# Altium PCB ioT.PcbDoc (part 2 of 3)
Units mm, origin at the board's own origin, x right, y up, seen from the top; angles counter-clockwise.
Board outline 92 x 94 mm, 4 copper layers (Top Layer, GROUND, POWER, Bottom Layer), stack 1.369 mm thick; 127 components, 88 nets, 449 pads, 105 vias.
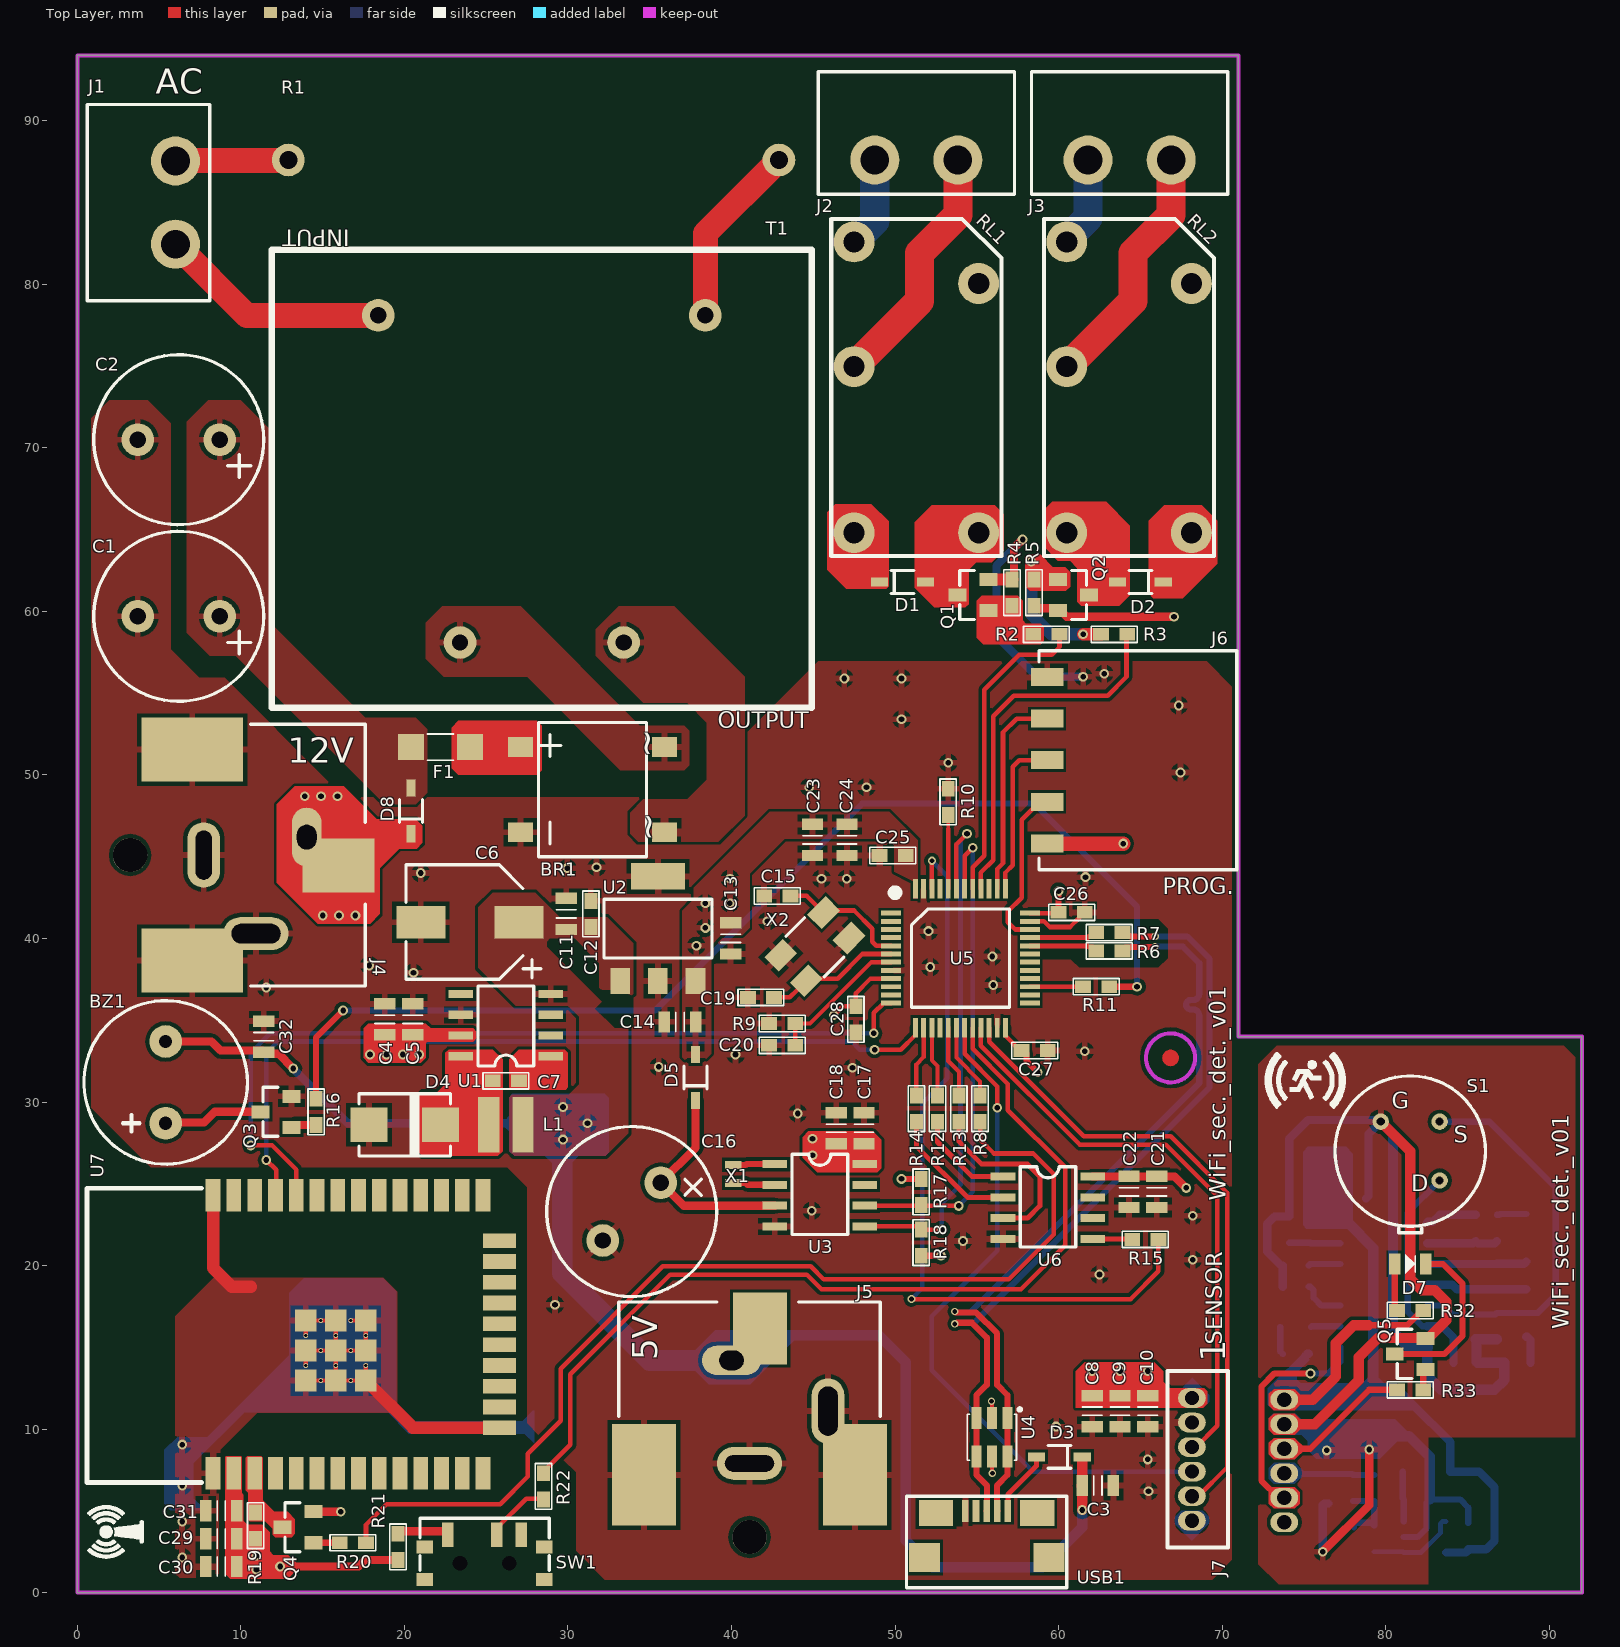
[diagram p0: Top Layer view]

## Part data (continued)
L1: library part "IND 47uH", "FIXED IND 47UH 390MA 2.3 OHM SMD", Case Code (Metric)=3030, Case Code (Imperial)=1212, Current Rating=390mA, DC Resistance (DCR)=2.3R, Manufacturer="Wurth Electronics", Max Operating Temperature=125°C, Min Operating Temperature=-40°C, Ratings=AEC-Q200, Resistor Type=Wirewound, Saturation Current=1.18A, Self Resonant Frequency=8MHz, Supplier Part Number 1=732-6947-1-ND, Test Frequency=100kHz, Tolerance=30%, Inductance=47uH, Case/Package=1212, Category="Fixed Inductors", ComponentLink1Description=https://media.digikey.com/pdf/Data%20Sheets/Wurth%20Electronics%20PDFs/Q+_Products_Flyer.pdf?src-supplier=Digi-Key, ComponentLink1URL=https://media.digikey.com/pdf/Data%20Sheets/Wurth%20Electronics%20PDFs/Q+_Products_Flyer.pdf?src-supplier=Digi-Key, Core Material=Ferrite, Designed by=BERK, Height - Seated (Max)=0.059inch, Length=0.118inch, Manufacturer Part Number=78438335470, Mount="Surface Mount", Packaging="Tape and Reel", Pricing 1="1=1,98000, 50=1,84800, 250=1,69100, 500=1,56800 (USD)", RoHS=No, RoHS Compliant=No, Shielding=Shielded, Stock 1=885, Supplier 1=Digi-Key, Width=0.118inch
Q1 Q2 Q3 Q4 Q5: "Transistor General Purpose BJT NPN 40 Volt 0.2A Automotive 3-Pin SOT-23", Case/Package=SOT-23, Collector Base Voltage (VCBO)=60V, Collector Emitter Breakdown Voltage=40V, Collector Emitter Saturation Voltage=300mV, Continuous Collector Current=200mA, Emitter Base Voltage (VEBO)=6V, Frequency=300MHz, Manufacturer="Diodes Zetex", Max Operating Temperature=150°C, Max Power Dissipation=300mW, Min Operating Temperature=-55°C, Package Quantity=3000, Power Dissipation=350mW, Supplier Part Number 1=MMBT3904-FDIDKR-ND, Category=BJTs, Collector Emitter Voltage (VCEO)=40V, Collector-emitter Voltage-Max=300mV, ComponentLink1Description=https://datasheet.ciiva.com/11201/ds30036-11201778.pdf?src-supplier=Avnet, ComponentLink1URL=https://datasheet.ciiva.com/11201/ds30036-11201778.pdf?src-supplier=Avnet, ComponentLink2Description=https://datasheet.ciiva.com/15138/getdatasheetpartid-53265-15138780.pdf?src-supplier=Verical, ComponentLink2URL=https://datasheet.ciiva.com/15138/getdatasheetpartid-53265-15138780.pdf?src-supplier=Verical, ComponentLink3Description=https://datasheet.ciiva.com/6361/ds30036-6361254.pdf?src-supplier=Digi-Key, ComponentLink3URL=https://datasheet.ciiva.com/6361/ds30036-6361254.pdf?src-supplier=Digi-Key, ComponentLink4Description=https://datasheet.ciiva.com/22711/1915516-22711750.pdf?src-supplier=Element14, ComponentLink4URL=https://datasheet.ciiva.com/22711/1915516-22711750.pdf?src-supplier=Element14, ComponentLink5Description=https://datasheet.ciiva.com/11198/ds30036-11198999.pdf?src-supplier=Avnet, ComponentLink5URL=https://datasheet.ciiva.com/11198/ds30036-11198999.pdf?src-supplier=Avnet, ComponentLink6Description=https://datasheet.ciiva.com/6361/ds30036-6361256.pdf?src-supplier=Digi-Key, ComponentLink6URL=https://datasheet.ciiva.com/6361/ds30036-6361256.pdf?src-supplier=Digi-Key, Contact Plating=Tin,Matte, Designed by=BERK, Element Configuration=Single, Gain Bandwidth Product=300MHz, Height=1mm, hFE Min=100, Lead Free="Lead Free", Length=3.05mm, Manufacturer Part Number=MMBT3904-7-F, Max Breakdown Voltage=40V, Max Collector Current=200mA, Max Frequency=300MHz, Mount="Surface Mount", Number of Elements=1, Number of Pins=3, Packaging="Tape and Reel", Polarity=NPN, Pricing 1="1=0,12000, 10=0,08600, 25=0,08280, 100=0,04660, 500=0,03664, 1000=0,02544 (USD)", Radiation Hardening=No, REACH SVHC="No SVHC", RoHS=Yes, RoHS Compliant=Yes, series=-, Stock 1=2393281, Supplier 1=Digi-Key, Transition Frequency=300MHz, Voltage Rating (DC)=40V, Weight=0.000282oz, Width=1.4mm
R1: "Resistor 5 Watt Cermet Wirewound Flameproof .27 Ohm 5% Axial Lead", Case/Package=Axial, Manufacturer="NTE Electronics", Max Operating Temperature=155°C, Min Operating Temperature=-55°C, Power Rating=5W, Resistance=270m, Supplier Part Number 1=33C8814, Temperature Coefficient=300ppm/°C, Tolerance=5%, Category="Through-Hole Resistors", ComponentLink1Description=https://datasheet.ciiva.com/15772/fivewire-15772442.pdf?src-supplier=Onlinecomponents.com, ComponentLink1URL=https://datasheet.ciiva.com/15772/fivewire-15772442.pdf?src-supplier=Onlinecomponents.com, ComponentLink2Description=http://datasheet.octopart.com/5WD27-NTE-Electronics-datasheet-137435208.pdf?src-supplier=NTE+Electronics, ComponentLink2URL=http://datasheet.octopart.com/5WD27-NTE-Electronics-datasheet-137435208.pdf?src-supplier=NTE+Electronics, ComponentLink3Description=http://datasheet.octopart.com/5WD27-NTE-Electronics-datasheet-21210163.pdf?src-supplier=Master+Electronics, ComponentLink3URL=http://datasheet.octopart.com/5WD27-NTE-Electronics-datasheet-21210163.pdf?src-supplier=Master+Electronics, Designed by=BERK, Manufacturer Part Number=5WD27, Mount="Through Hole", Pricing 1="1=0,47600 (USD)", RoHS Compliant=No, Supplier 1=Newark, Termination=Axial
R2 R3 R19 R26 R33 R35: library part "RES 1K OHM 0603", "RES 1K %1 OHM 0603 SMD", Case Code (Metric)=1608, Case Code (Imperial)=0603, Manufacturer=Yageo, Manufacturer Part Number=RC0603JR-071KL, Max Operating Temperature=155°C, Min Operating Temperature=-55°C, Package Quantity=5000, Power Rating=100mW, Resistance=1kR, Resistance Tolerance=5%, Resistor Type="Thick Film", Supplier Part Number 1=311-1.0KGRCT-ND, Temperature Coefficient=100ppm/°C, Voltage Rating=50V, Body Length=1.6mm, Case/Package=0603, Category="Chip SMD Resistors", ComponentLink1Description=https://datasheet.ciiva.com/8883/pyu-rc0603-51-rohs-l-4-8883051.pdf?src-supplier=Avnet, ComponentLink1URL=https://datasheet.ciiva.com/8883/pyu-rc0603-51-rohs-l-4-8883051.pdf?src-supplier=Avnet, ComponentLink2Description=https://datasheet.ciiva.com/7746/443971-7746461.pdf?src-supplier=Element14, ComponentLink2URL=https://datasheet.ciiva.com/7746/443971-7746461.pdf?src-supplier=Element14, ComponentLink3Description=https://datasheet.ciiva.com/22747/443971-22747533.pdf?src-supplier=Element14, ComponentLink3URL=https://datasheet.ciiva.com/22747/443971-22747533.pdf?src-supplier=Element14, ComponentLink4Description=https://datasheet.ciiva.com/7746/443971-7746462.pdf?src-supplier=Element14, ComponentLink4URL=https://datasheet.ciiva.com/7746/443971-7746462.pdf?src-supplier=Element14, Construction=Rectangular, Contact Plating=Tin,Matte, Depth=0.8mm, Designed by=BERK, Height=0.45mm, Lead Free="Lead Free", Length=1.6mm, Military Standard=Not, Number of Pins=2, Packaging="Tape and Reel", Pricing 1="1=0,10000, 10=0,01900, 100=0,00770, 1000=0,00344, 2500=0,00298 (USD)", Radiation Hardening=No, REACH SVHC=Unknown, RoHS=Yes, RoHS Compliant=Yes, series=RC, Size Code=0603, Stock 1=5112056, Supplier 1=Digi-Key, Termination=SMD/SMT, Tolerance=5%, Voltage Rating (DC)=50V, Width=0.8mm
R4 R5 R25 R28 R37: library part "RES 10K OHM 0603", "RES 10K %1 OHM 0603 SMD", Case Code (Metric)=1608, Case Code (Imperial)=0603, Manufacturer=Yageo, Max Operating Temperature=155°C, Max Power Dissipation=100mW, Min Operating Temperature=-55°C, Resistance=10kR, Resistance Tolerance=1%, Resistor Type="Thick Film", Supplier Part Number 1=311-10.0KHRCT-ND, Temperature Coefficient=100ppm/°C, Voltage Rating=75V, Voltage Rating (DC)=50V, Case/Package=0603, Category="Chip SMD Resistors", ComponentLink1Description=https://datasheet.ciiva.com/7660/38590-7660789.pdf?src-supplier=Element14, ComponentLink1URL=https://datasheet.ciiva.com/7660/38590-7660789.pdf?src-supplier=Element14, ComponentLink2Description=https://datasheet.ciiva.com/15189/getdatasheetpartid-409289-15189591.pdf?src-supplier=Verical, ComponentLink2URL=https://datasheet.ciiva.com/15189/getdatasheetpartid-409289-15189591.pdf?src-supplier=Verical, ComponentLink3Description=https://datasheet.ciiva.com/46440/1868787-46440891.pdf?src-supplier=Element14, ComponentLink3URL=https://datasheet.ciiva.com/46440/1868787-46440891.pdf?src-supplier=Element14, ComponentLink4Description=https://datasheet.ciiva.com/7983/443971-7983596.pdf?src-supplier=Element14, ComponentLink4URL=https://datasheet.ciiva.com/7983/443971-7983596.pdf?src-supplier=Element14, ComponentLink5Description=https://datasheet.ciiva.com/7746/1738695-7746239.pdf?src-supplier=Element14, ComponentLink5URL=https://datasheet.ciiva.com/7746/1738695-7746239.pdf?src-supplier=Element14, ComponentLink6Description=https://datasheet.ciiva.com/22747/443971-22747519.pdf?src-supplier=Element14, ComponentLink6URL=https://datasheet.ciiva.com/22747/443971-22747519.pdf?src-supplier=Element14, Construction=Rectangular, Depth=0.8mm, Designed by=BERK, Features="Moisture Resistant", Height=0.45mm, Lead Free="Lead Free", Lead Pitch=0.3mm, Length=1.6mm, Manufacturer Part Number=RC0603FR-0710KL, Military Standard=Not, Number of Pins=2, Number of Terminations=2, Packaging="Tape and Reel", Power Rating=100mW, Pricing 1="1=0,10000, 10=0,02300, 100=0,00930, 1000=0,00417, 2500=0,00362 (USD)", REACH SVHC=Unknown, RoHS=Yes, RoHS Compliant=Yes, series=RC, Size Code=0603, Stock 1=24140601, Supplier 1=Digi-Key, Termination=SMD/SMT, Tolerance=1%, Weight=7.1E-05oz, Width=0.8mm
R6 R7: library part "RES 15 OHM 0603", "RES 15 %5 OHM 0603 SMD", Case Code (Metric)=1608, Case Code (Imperial)=0603, Manufacturer=Yageo, Max Operating Temperature=155°C, Max Power Dissipation=100mW, Min Operating Temperature=-55°C, Package Quantity=1, Resistance=15R, Resistance Tolerance=5%, Resistor Type="Thick Film", Supplier Part Number 1=311-15GRCT-ND, Temperature Coefficient=100ppm/°C, Voltage Rating=75V, Voltage Rating (DC)=50V, Case/Package=0603, Category="Chip SMD Resistors", ComponentLink1Description=https://datasheet.ciiva.com/2453/pyu-r-int-thick-7-2453085.pdf?src-supplier=Digi-Key, ComponentLink1URL=https://datasheet.ciiva.com/2453/pyu-r-int-thick-7-2453085.pdf?src-supplier=Digi-Key, ComponentLink2Description=https://datasheet.ciiva.com/7746/443971-7746445.pdf?src-supplier=Element14, ComponentLink2URL=https://datasheet.ciiva.com/7746/443971-7746445.pdf?src-supplier=Element14, ComponentLink3Description=https://datasheet.ciiva.com/2453/pyu-r-int-thick-7-2453086.pdf?src-supplier=Digi-Key, ComponentLink3URL=https://datasheet.ciiva.com/2453/pyu-r-int-thick-7-2453086.pdf?src-supplier=Digi-Key, ComponentLink4Description=https://datasheet.ciiva.com/7746/443971-7746446.pdf?src-supplier=Element14, ComponentLink4URL=https://datasheet.ciiva.com/7746/443971-7746446.pdf?src-supplier=Element14, ComponentLink5Description=https://datasheet.ciiva.com/2453/pyu-r-int-thick-7-2453087.pdf?src-supplier=Digi-Key, ComponentLink5URL=https://datasheet.ciiva.com/2453/pyu-r-int-thick-7-2453087.pdf?src-supplier=Digi-Key, Construction=Rectangular, Depth=0.8mm, Designed by=BERK, Features="Moisture Resistant", Height=0.022inch, Lead Free="Lead Free", Length=1.6mm, Manufacturer Part Number=RC0603JR-0715RL, Military Standard=Not, Number of Pins=2, Number of Terminations=2, Packaging="Tape and Reel", Power Rating=100mW, Pricing 1="1=0,10000, 10=0,01900, 100=0,00770, 1000=0,00344, 2500=0,00298 (USD)", REACH SVHC="No SVHC", RoHS=Yes, RoHS Compliant=Yes, series=RC, Stock 1=1720, Supplier 1=Digi-Key, Termination=SMD/SMT, Tolerance=5%, Weight=7.1E-05oz, Width=0.8mm, Working Voltage=75V
R8 R9 R10 R11 R12 R13 R14 R15 R16 R20 R21 R22 R32: library part "RES 100 OHM 0603", "RES 100 %5 OHM 0603 SMD", Case Code (Metric)=1608, Case Code (Imperial)=0603, Manufacturer=Yageo, Max Operating Temperature=155°C, Max Power Dissipation=100mW, Min Operating Temperature=-55°C, Resistance=100R, Resistance Tolerance=5%, Resistor Type="Thick Film", Supplier Part Number 1=311-100GRCT-ND, Temperature Coefficient=100ppm/°C, Voltage Rating=50V, Case/Package=0603, Category="Chip SMD Resistors", ComponentLink1Description=https://datasheet.ciiva.com/15189/getdatasheetpartid-325207-15189846.pdf?src-supplier=Verical, ComponentLink1URL=https://datasheet.ciiva.com/15189/getdatasheetpartid-325207-15189846.pdf?src-supplier=Verical, ComponentLink2Description=https://datasheet.ciiva.com/8883/pyu-rc0603-51-rohs-l-4-8883047.pdf?src-supplier=Avnet, ComponentLink2URL=https://datasheet.ciiva.com/8883/pyu-rc0603-51-rohs-l-4-8883047.pdf?src-supplier=Avnet, ComponentLink3Description=https://datasheet.ciiva.com/7746/443971-7746425.pdf?src-supplier=Element14, ComponentLink3URL=https://datasheet.ciiva.com/7746/443971-7746425.pdf?src-supplier=Element14, ComponentLink4Description=https://datasheet.ciiva.com/7746/443971-7746426.pdf?src-supplier=Element14, ComponentLink4URL=https://datasheet.ciiva.com/7746/443971-7746426.pdf?src-supplier=Element14, Construction=Rectangular, Contact Plating=Tin,Matte, Depth=0.8mm, Designed by=BERK, Features="Moisture Resistant", Lead Free="Lead Free", Length=1.6mm, Manufacturer Part Number=RC0603JR-07100RL, Military Standard=Not, Number of Pins=2, Number of Terminations=2, Packaging="Tape and Reel", Power Rating=100mW, Pricing 1="1=0,10000, 10=0,01900, 100=0,00770, 1000=0,00344, 2500=0,00298 (USD)", Radiation Hardening=No, REACH SVHC=Unknown, RoHS=Yes, RoHS Compliant=Yes, series=RC, Size Code=0603, Stock 1=4334796, Supplier 1=Digi-Key, Termination=SMD/SMT, Tolerance=5%, Voltage Rating (DC)=50V, Width=0.8mm
R17 R18: library part "RES 4K7 OHM 0603", "RES 4K7 %5 OHM 0603 SMD", Case Code (Metric)=1608, Case Code (Imperial)=0603, Manufacturer=Yageo, Max Operating Temperature=155°C, Max Power Dissipation=100mW, Min Operating Temperature=-55°C, Resistance=4.7kR, Resistance Tolerance=5%, Resistor Type="Thick Film", Supplier Part Number 1=311-4.7KGRCT-ND, Temperature Coefficient=100ppm/°C, Voltage Rating=50V, Case/Package=0603, Category="Chip SMD Resistors", ComponentLink1Description=https://datasheet.ciiva.com/46412/443971-46412858.pdf?src-supplier=Element14, ComponentLink1URL=https://datasheet.ciiva.com/46412/443971-46412858.pdf?src-supplier=Element14, Construction=Rectangular, Depth=0.8mm, Designed by=BERK, Features="Moisture Resistant", Lead Free="Lead Free", Length=1.6mm, Manufacturer Part Number=RC0603JR-074K7L, Military Standard=Not, Number of Pins=2, Number of Terminations=2, Packaging="Tape and Reel", Power Rating=100mW, Pricing 1="1=0,10000, 10=0,01900, 100=0,00770, 1000=0,00344, 2500=0,00298 (USD)", REACH SVHC="No SVHC", RoHS=Yes, RoHS Compliant=Yes, series=RC, Size Code=0603, Stock 1=3901839, Supplier 1=Digi-Key, Termination=SMD/SMT, Tolerance=5%, Voltage Rating (DC)=50V, Width=0.8mm
R23 R27: library part "RES 560K OHM 0603", "RES SMD 560K OHM 5% 1/10W 0603", Case Code (Metric)=1608, Case Code (Imperial)=0603, Manufacturer=Yageo, Max Operating Temperature=155°C, Max Power Dissipation=100mW, Min Operating Temperature=-55°C, Package Quantity=1, Resistance=560kR, Resistance Tolerance=5%, Resistor Type="Thick Film", Supplier Part Number 1=311-560KGRCT-ND, Temperature Coefficient=100ppm/°C, Voltage Rating=75V, Voltage Rating (DC)=50V, Case/Package=0603, Category="Chip SMD Resistors", ComponentLink1Description=https://datasheet.ciiva.com/2453/pyu-r-int-thick-7-2453056.pdf?src-supplier=Digi-Key, ComponentLink1URL=https://datasheet.ciiva.com/2453/pyu-r-int-thick-7-2453056.pdf?src-supplier=Digi-Key, ComponentLink2Description=https://datasheet.ciiva.com/2453/pyu-r-int-thick-7-2453057.pdf?src-supplier=Digi-Key, ComponentLink2URL=https://datasheet.ciiva.com/2453/pyu-r-int-thick-7-2453057.pdf?src-supplier=Digi-Key, ComponentLink3Description=https://datasheet.ciiva.com/2453/pyu-r-int-thick-7-2453055.pdf?src-supplier=Digi-Key, ComponentLink3URL=https://datasheet.ciiva.com/2453/pyu-r-int-thick-7-2453055.pdf?src-supplier=Digi-Key, Construction=Rectangular, Depth=0.8mm, Designed by=BERK, Features="Moisture Resistant", Height=0.022inch, Lead Free="Lead Free", Length=1.6mm, Manufacturer Part Number=RC0603JR-07560KL, Military Standard=Not, Number of Pins=2, Number of Terminations=2, Packaging="Tape and Reel", Power Rating=100mW, Pricing 1="1=0,10000, 10=0,01900, 100=0,00770, 1000=0,00344, 2500=0,00298 (USD)", REACH SVHC=Unknown, RoHS=Yes, RoHS Compliant=Yes, series=RC, Stock 1=686040, Supplier 1=Digi-Key, Technology="THICK FILM", Termination=SMD/SMT, Tolerance=5%, Weight=7.1E-05oz, Width=0.8mm, Working Voltage=75V
R24 R34 R36: library part "RES 220K OHM 0603", "RES 220K %5 OHM 0603 SMD", Case Code (Metric)=1608, Case Code (Imperial)=0603, Manufacturer=Yageo, Max Operating Temperature=155°C, Max Power Dissipation=100mW, Min Operating Temperature=-55°C, Package Quantity=1, Resistance=220kR, Resistance Tolerance=5%, Resistor Type="Thick Film", Supplier Part Number 1=311-220KGRCT-ND, Temperature Coefficient=100ppm/°C, Voltage Rating=50V, Case/Package=0603, Category="Chip SMD Resistors", ComponentLink1Description=https://datasheet.ciiva.com/2452/pyu-r-int-thick-7-2452923.pdf?src-supplier=Digi-Key, ComponentLink1URL=https://datasheet.ciiva.com/2452/pyu-r-int-thick-7-2452923.pdf?src-supplier=Digi-Key, ComponentLink2Description=https://datasheet.ciiva.com/2452/pyu-r-int-thick-7-2452924.pdf?src-supplier=Digi-Key, ComponentLink2URL=https://datasheet.ciiva.com/2452/pyu-r-int-thick-7-2452924.pdf?src-supplier=Digi-Key, ComponentLink3Description=https://datasheet.ciiva.com/2452/pyu-r-int-thick-7-2452925.pdf?src-supplier=Digi-Key, ComponentLink3URL=https://datasheet.ciiva.com/2452/pyu-r-int-thick-7-2452925.pdf?src-supplier=Digi-Key, Construction=Rectangular, Deisgned by=BERK, Depth=0.8mm, Features="Moisture Resistant", Height=0.022inch, Lead Free="Lead Free", Length=1.6mm, Manufacturer Part Number=RC0603JR-07220KL, Military Standard=Not, Number of Pins=2, Number of Terminations=2, Packaging="Tape and Reel", Power Rating=100mW, Pricing 1="1=0,10000, 10=0,01900, 100=0,00770, 1000=0,00344, 2500=0,00298 (USD)", REACH SVHC="No SVHC", RoHS=Yes, RoHS Compliant=Yes, series=RC, Size Code=0603, Stock 1=558053, Supplier 1=Digi-Key, Termination=SMD/SMT, Tolerance=5%, Voltage Rating (DC)=50V, Width=0.031inch
R29 R30: library part "RES 0 OHM 0603", "RES 0 %1 OHM 0603 SMD", Case Code (Metric)=1608, Case Code (Imperial)=0603, Manufacturer=Yageo, Max Operating Temperature=155°C, Max Power Dissipation=100mW, Min Operating Temperature=-55°C, Package Quantity=5000, Resistance=0R, Resistance Tolerance=5%, Resistor Type="Thick Film", Supplier Part Number 1=311-0.0GRCT-ND, Temperature Coefficient=200ppm/°C, Tolerance=1%, Voltage Rating=50V, Case/Package=0603, Category="Chip SMD Resistors", ComponentLink1Description=https://datasheet.ciiva.com/11808/pyu-r-int-6-11808700.pdf?src-supplier=RSComponents, ComponentLink1URL=https://datasheet.ciiva.com/11808/pyu-r-int-6-11808700.pdf?src-supplier=RSComponents, ComponentLink2Description=https://datasheet.ciiva.com/7746/1738695-7746421.pdf?src-supplier=Element14, ComponentLink2URL=https://datasheet.ciiva.com/7746/1738695-7746421.pdf?src-supplier=Element14, ComponentLink3Description=https://datasheet.ciiva.com/8883/pyu-rc0603-51-rohs-l-4-8883045.pdf?src-supplier=Avnet, ComponentLink3URL=https://datasheet.ciiva.com/8883/pyu-rc0603-51-rohs-l-4-8883045.pdf?src-supplier=Avnet, ComponentLink4Description=https://datasheet.ciiva.com/15189/getdatasheetpartid-329462-15189845.pdf?src-supplier=Verical, ComponentLink4URL=https://datasheet.ciiva.com/15189/getdatasheetpartid-329462-15189845.pdf?src-supplier=Verical, ComponentLink5Description=https://datasheet.ciiva.com/7746/1738695-7746422.pdf?src-supplier=Element14, ComponentLink5URL=https://datasheet.ciiva.com/7746/1738695-7746422.pdf?src-supplier=Element14, ComponentLink6Description=https://datasheet.ciiva.com/12555/rc0603-272842-12555254.pdf?src-supplier=Mouser, ComponentLink6URL=https://datasheet.ciiva.com/12555/rc0603-272842-12555254.pdf?src-supplier=Mouser, ComponentLink7Description=https://datasheet.ciiva.com/22747/443971-22747530.pdf?src-supplier=Element14, ComponentLink7URL=https://datasheet.ciiva.com/22747/443971-22747530.pdf?src-supplier=Element14, Construction=Rectangular, Contact Plating=Tin,Matte, Depth=0.8mm, Designed by=BERK, Features="Moisture Resistant", Height=0.45mm, Lead Free="Lead Free", Length=1.6mm, Manufacturer Part Number=RC0603JR-070RL, Military Standard=Not, Number of Pins=2, Number of Terminations=2, Packaging="Tape and Reel", Power Rating=100mW, Pricing 1="1=0,10000, 10=0,01700, 25=0,01240, 50=0,00940, 100=0,00700, 250=0,00532, 500=0,00424, 1000=0,00313 (USD)", Radiation Hardening=No, REACH SVHC="No SVHC", RoHS=Yes, RoHS Compliant=Yes, series=RC, Size Code=0603, Stock 1=4657486, Supplier 1=Digi-Key, Technology="THICK FILM", Termination=SMD/SMT, Voltage Rating (DC)=50V, Width=0.8mm
R31: library part "RES 43K OHM 0603", "RES 43K %5 OHM 0603 SMD", Case Code (Metric)=1608, Case Code (Imperial)=0603, Manufacturer=Yageo, Max Operating Temperature=155°C, Max Power Dissipation=100mW, Min Operating Temperature=-55°C, Package Quantity=1, Resistance=43kR, Resistor Type="Thick Film", Supplier Part Number 1=311-43KGRCT-ND, Temperature Coefficient=100ppm/°C, Tolerance=5%, Voltage Rating=75V, Voltage Rating (DC)=50V, Case/Package=0603, Category="Chip SMD Resistors", ComponentLink1Description=https://datasheet.ciiva.com/2453/pyu-r-int-thick-7-2453052.pdf?src-supplier=Digi-Key, ComponentLink1URL=https://datasheet.ciiva.com/2453/pyu-r-int-thick-7-2453052.pdf?src-supplier=Digi-Key, ComponentLink2Description=https://datasheet.ciiva.com/2453/pyu-r-int-thick-7-2453053.pdf?src-supplier=Digi-Key, ComponentLink2URL=https://datasheet.ciiva.com/2453/pyu-r-int-thick-7-2453053.pdf?src-supplier=Digi-Key, ComponentLink3Description=https://datasheet.ciiva.com/2453/pyu-r-int-thick-7-2453054.pdf?src-supplier=Digi-Key, ComponentLink3URL=https://datasheet.ciiva.com/2453/pyu-r-int-thick-7-2453054.pdf?src-supplier=Digi-Key, Construction=Rectangular, Depth=0.8mm, Designed by=BERK, Features="Moisture Resistant", Height=0.022inch, Lead Free="Lead Free", Length=1.6mm, Manufacturer Part Number=RC0603JR-0743KL, Military Standard=Not, Number of Terminations=2, Packaging="Tape and Reel", Power Rating=100mW, Pricing 1="1=0,10000, 10=0,01900, 100=0,00770, 1000=0,00344, 2500=0,00298 (USD)", RoHS=Yes, RoHS Compliant=Yes, series=RC, Stock 1=127716, Supplier 1=Digi-Key, Technology="THICK FILM", Termination=SMD/SMT, Weight=7.1E-05oz, Width=0.8mm, Working Voltage=75V
RL1 RL2: "General Purpose Relay SPDT (1 Form C) 12VDC Coil Through Hole", Coil Current=33.3mA, Coil Power=400mW, Coil Resistance=360R, Coil Voltage (DC)=12V, Contact Current Rating=10A, Manufacturer=Panasonic, Max Operating Temperature=85°C, Max Voltage Rating (AC)=250V, Min Operating Temperature=-40°C, Package Quantity=100, Supplier Part Number 1=255-3562-ND, Case/Package=ALQ112, Category="Power Relays", Coil Type=Non-Latching, ComponentLink1Description=https://datasheet.ciiva.com/24388/307ds-61b20-en-lq-24388909.pdf?src-supplier=Onlinecomponents.com, ComponentLink1URL=https://datasheet.ciiva.com/24388/307ds-61b20-en-lq-24388909.pdf?src-supplier=Onlinecomponents.com, Contact Material=Silver, Depth=10mm, Designed by=BERK, Height=16mm, Lead Free="Lead Free", Length=20mm, Manufacturer Part Number=ALQ112, Number of Pins=5, Operate Time=20ms, Packaging=Carton, Power Consumption=400mW, Power Rating=400mW, Pricing 1="1=1,22000, 10=1,14800, 25=1,02000, 50=0,96900, 100=0,91800, 250=0,81600, 500=0,76500, 1000=0,71400, 5000=0,68850 (USD)", REACH SVHC=Unknown, Relay Type="General Purpose", Release Time=20ms, RoHS=Yes, RoHS Compliant=Yes, series=ALQ, Stock 1=10772, Supplier 1=Digi-Key, Termination="PC Pin", Throw Configuration=SPDT, Voltage Rating (AC)=250V, Weight=7g, Width=10mm
RT1: "Thermistor PTC 10K Ohm 1% 1206", Case/Package=1206, Manufacturer="Vishay Dale", Max Operating Temperature=125°C, Max Power Dissipation=125mW, Min Operating Temperature=-55°C, Package Quantity=5000, Resistance=10kR, Resistance Tolerance=1%, Supplier Part Number 1=541-3533-1-ND, Voltage=40V, Category=Thermistors, ComponentLink1Description=https://datasheet.ciiva.com/2852/tfpt-2852076.pdf?src-supplier=Digi-Key, ComponentLink1URL=https://datasheet.ciiva.com/2852/tfpt-2852076.pdf?src-supplier=Digi-Key, Depth=1.6mm, Designed by=BERK, Height=0.55mm, Lead Free="Lead Free", Length=3.2mm, Manufacturer Part Number=TFPT1206L1002FM, Mount="Surface Mount", Number of Pins=2, Packaging="Tape and Reel", Power Rating=125mW, Pricing 1="1=0,99000, 10=0,92300, 25=0,85400, 50=0,73980, 100=0,67110, 500=0,56432, 1000=0,50332 (USD)", RoHS=Yes, RoHS Compliant=Yes, series=TFPT, Stock 1=9062, Supplier 1=Digi-Key, Termination=SMD/SMT, Tolerance=1%, Width=1.6mm
S1: "SENSOR PYRO DETECTOR DUAL MOTION", Case/Package=LHI, Max Supply Voltage=12, Min Supply Voltage=2, Supplier Part Number=1601-LHI878/3902-ND, Designed by=BERK, Supplier 1=Digi-Key, Type="Pyro Detector"
SW1: "Slide Switch, SPDT, 0.025A, 24V, SMD", Case/Package=Axial, Current Rating=25mA, Manufacturer=E-Switch, Max Operating Temperature=175°C, Max Power Dissipation=5W, Min Operating Temperature=-20°C, Operating Force=150gf, Supplier Part Number 1=EG5720CT-ND, Tolerance=4.95%, Voltage Rating (DC)=24V, Zener Voltage=9.1V, Actuator Length=1.4mm, Actuator Type=Standard, ComponentLink1Description=https://media.digikey.com/pdf/Data%20Sheets/E-Switch%20PDFs/EG1215_Series_Ds.pdf?src-supplier=Digi-Key, ComponentLink1URL=https://media.digikey.com/pdf/Data%20Sheets/E-Switch%20PDFs/EG1215_Series_Ds.pdf?src-supplier=Digi-Key, ComponentLink2Description=http://www.farnell.com/datasheets/2645007.pdf?src-supplier=Farnell, ComponentLink2URL=http://www.farnell.com/datasheets/2645007.pdf?src-supplier=Farnell, Designed by=BERK, Electrical Life=10000Cycles, Manufacturer Part Number=EG1215AA, Mechanical Life=10000Cycles, Mount="Surface Mount,Through Hole", Packaging="Cut Tape", Pricing 1="1=0,85000, 10=0,81900, 25=0,76560, 100=0,66470, 250=0,60480, 500=0,56070, 1000=0,51975 (USD)", RoHS=No, Stock 1=6245, Supplier 1=Digi-Key, Switch Function=On-On, Switch Travel=1.5mm, Termination="Gull Wing", Throw Configuration=SPDT, Impedance=2R
T1: "230-12 Transformer 1VA", Manufacturer="Zettler Magnetics", Operating Frequency=50-60Hz, Primary Voltage=230V, Rated Power=1VA, Secondary Voltage=12V, Supplier Part Number 1=2469-BV302S12010-ZU-ND, Designed by=BERK, Manufacturer Part Number=BV302S12010-ZU, RoHS=No, Supplier 1=Digi-Key
U1: "Switching Voltage Regulators Pwr Cnvtr Hi Eff 1A SD Vtg Reg", Case/Package="SOIC N", Manufacturer="TI National Semiconductor", Max Operating Temperature=125°C, Max Output Current=1A, Max Input Voltage=40V, Min Operating Temperature=-40°C, Min Input Voltage=8V, Output Voltage=12V, Package Quantity=2500, Quiescent Current=2.5mA, Supplier Part Number 1=296-35410-1-ND, Switching Frequency=260kHz, Category="Voltage Regulators - Switching", ComponentLink1Description=https://datasheet.ciiva.com/41457/001013881-da-01-en-ic-reg-buck-lm2675mx-12-nopb-soic-8-tid-41457896.pdf?src-supplier=Conrad, ComponentLink1URL=https://datasheet.ciiva.com/41457/001013881-da-01-en-ic-reg-buck-lm2675mx-12-nopb-soic-8-tid-41457896.pdf?src-supplier=Conrad, ComponentLink2Description=https://datasheet.ciiva.com/3220/lm2675-3220840.pdf?src-supplier=Avnet, ComponentLink2URL=https://datasheet.ciiva.com/3220/lm2675-3220840.pdf?src-supplier=Avnet, Contact Plating=Tin, Designed by=BERK, Efficiency=94%, Lead Free="Lead Free", Manufacturer Part Number=LM2675MX-12/NOPB, Mount="Surface Mount", Number of Outputs=1, Number of Pins=8, Operating Supply Voltage=40V, Output Current=1A, Output Type=Fixed, Packaging="Tape and Reel", Pricing 1="1=4,49000, 10=4,03600, 25=3,81600, 100=3,13760, 250=2,81536, 500=2,71360, 1000=2,25568 (USD)", Radiation Hardening=No, RoHS=Yes, RoHS Compliant=Yes, series=LM2675, Stock 1=1475, Supplier 1=Digi-Key, Synchronous Rectifier=No
U2: "LDO Regulator Pos 3.3V 1A 4-Pin(3+Tab) SOT-223 T/R", Case/Package=SOT-223, Dropout Voltage=500mV, Manufacturer=Diodes, Max Operating Temperature=85°C, Max Output Current=1A, Max Power Dissipation=1.1W, Max Input Voltage=6V, Min Current Limit=1.1A, Min Operating Temperature=-40°C, Min Input Voltage=2.2V, Output Voltage=3.3V, Package Quantity=1, Power Dissipation=1.1kW, Power Supply Rejection Ratio (PSRR)=65dB, Quiescent Current=70uA, Reference Voltage=800mV, Supplier Part Number 1=AP7361-33E-13DICT-ND, Accuracy=1%, Category="Voltage Regulators - Linear", ComponentLink1Description=https://datasheet.ciiva.com/26926/getdatasheetpartid-670786-26926141.pdf?src-supplier=Verical, ComponentLink1URL=https://datasheet.ciiva.com/26926/getdatasheetpartid-670786-26926141.pdf?src-supplier=Verical, ComponentLink2Description=https://datasheet.ciiva.com/25651/ap7361-25651049.pdf?src-supplier=Digi-Key, ComponentLink2URL=https://datasheet.ciiva.com/25651/ap7361-25651049.pdf?src-supplier=Digi-Key, ComponentLink3Description=https://datasheet.ciiva.com/29568/ap7361-29568378.pdf?src-supplier=Digi-Key, ComponentLink3URL=https://datasheet.ciiva.com/29568/ap7361-29568378.pdf?src-supplier=Digi-Key, ComponentLink4Description=https://datasheet.ciiva.com/29568/ap7361-29568379.pdf?src-supplier=Digi-Key, ComponentLink4URL=https://datasheet.ciiva.com/29568/ap7361-29568379.pdf?src-supplier=Digi-Key, Contact Plating=Tin,Matte, Designed by=BERK, Lead Free="Lead Free", Manufacturer Part Number=AP7361-33E-13, Mount="Surface Mount", Number of Outputs=1, Number of Pins=4, Number of Regulators=1, Output Current=1A, Output Type=Fixed, Packaging="Tape and Reel", Polarity=Positive, Pricing 1="1=0,51000, 10=0,41400, 25=0,37840, 100=0,25510, 250=0,21116, 500=0,19356, 1000=0,14517 (USD)", Radiation Hardening=No, REACH SVHC="No SVHC", RoHS=Yes, RoHS Compliant=Yes, series=-, Stock 1=45122, Supplier 1=Digi-Key, Weight=0.000282oz
U3: "IC RTC CLK/CALENDAR I2C 8-SOIC", Case/Package=SOIC, Manufacturer=STMicroelectronics, Max Operating Temperature=85°C, Max Supply Voltage=5.5V, Min Operating Temperature=-40°C, Min Supply Voltage=2V, Package Quantity=2500, Supplier Part Number 1=497-4697-1-ND, Temperature Grade=INDUSTRIAL, Category=Memory, ComponentLink1Description=https://datasheet.ciiva.com/25889/cd00001542-25889923.pdf?src-supplier=Avnet+Europe, ComponentLink1URL=https://datasheet.ciiva.com/25889/cd00001542-25889923.pdf?src-supplier=Avnet+Europe, ComponentLink2Description=https://datasheet.ciiva.com/16213/cd00001542-16213654.pdf?src-supplier=Future+Electronics, ComponentLink2URL=https://datasheet.ciiva.com/16213/cd00001542-16213654.pdf?src-supplier=Future+Electronics, ComponentLink3Description=https://datasheet.ciiva.com/7630/1837112-7630077.pdf?src-supplier=Element14, ComponentLink3URL=https://datasheet.ciiva.com/7630/1837112-7630077.pdf?src-supplier=Element14, ComponentLink4Description=https://datasheet.ciiva.com/41459/001185345-da-01-en-ic-rtc-srl-512kbit-m41t00m6f-soic-8-stm-41459818.pdf?src-supplier=Conrad, ComponentLink4URL=https://datasheet.ciiva.com/41459/001185345-da-01-en-ic-rtc-srl-512kbit-m41t00m6f-soic-8-stm-41459818.pdf?src-supplier=Conrad, Date Format=YY-MM-DD-dd, Designed by=BERK, Height=1.5mm, Lead Free="Lead Free", Length=5mm, Logic Function=Clock, Manufacturer Part Number=M41T00M6F, Memory Size=8B, Mount="Surface Mount", Non-volatile Memory Size=8B, Number of Pins=8, Packaging="Tape and Reel", Pricing 1="1=2,81000, 10=2,52200, 25=2,37960, 100=2,02750, 250=1,90376, 500=1,79600 (USD)", Radiation Hardening=No, RAM Size=8B, REACH SVHC="No SVHC", RoHS=Yes, RoHS Compliant=Yes, series=M41T00, Stock 1=13199, Supplier 1=Digi-Key, Supply Voltage-Nom=5.5V, Time Format=HH:MM:SS, Weight=0.019048oz, Width=4mm, Interface=I2C,Serial,2-Wire
U4: library part "USB PROTECTION", "TVS DIODE 5.25V 17V SOT23-6", Breakdown Voltage=6V, Capacitance=3.5pF, Case/Package=SOT-23, Clamping Voltage=17V, Leakage Current=150nA, Manufacturer=STMicroelectronics, Max Operating Temperature=125°C, Min Operating Temperature=-40°C, Operating Supply Voltage=1.1V, Package Quantity=3000, Peak Pulse Current=5A, Power Line Protection=Yes, Reverse Standoff Voltage=5.25V, Supplier Part Number 1=497-5235-1-ND, Test Current=1mA, Working Voltage=5V, Category="TVS Diodes", Clamping Voltage-Max=17V, ComponentLink1Description=https://datasheet.ciiva.com/1268/1690354-1268384.pdf?src-supplier=Element14, ComponentLink1URL=https://datasheet.ciiva.com/1268/1690354-1268384.pdf?src-supplier=Element14, ComponentLink2Description=https://datasheet.ciiva.com/4508/cd00050750-113117-4508433.pdf?src-supplier=Mouser, ComponentLink2URL=https://datasheet.ciiva.com/4508/cd00050750-113117-4508433.pdf?src-supplier=Mouser, ComponentLink3Description=https://datasheet.ciiva.com/15143/getdatasheetpartid-148465-15143789.pdf?src-supplier=Verical, ComponentLink3URL=https://datasheet.ciiva.com/15143/getdatasheetpartid-148465-15143789.pdf?src-supplier=Verical, ComponentLink4Description=https://datasheet.ciiva.com/26787/usblc6-2sc6-26787908.pdf?src-supplier=IIIC, ComponentLink4URL=https://datasheet.ciiva.com/26787/usblc6-2sc6-26787908.pdf?src-supplier=IIIC, ComponentLink5Description=https://datasheet.ciiva.com/16200/cd00050750-16200026.pdf?src-supplier=Future+Electronics, ComponentLink5URL=https://datasheet.ciiva.com/16200/cd00050750-16200026.pdf?src-supplier=Future+Electronics, ComponentLink6Description=https://datasheet.ciiva.com/41444/001184109-da-01-en-ic-esd-protecti-usblc6-2sc6-sot-23-6-stm-41444156.pdf?src-supplier=Conrad, ComponentLink6URL=https://datasheet.ciiva.com/41444/001184109-da-01-en-ic-esd-protecti-usblc6-2sc6-sot-23-6-stm-41444156.pdf?src-supplier=Conrad, Contact Plating=Tin,Matte, Data Rate=480Mbps, Depth=1.75mm, Designed by=BERK, Direction=Unidirectional,Bidirectional, Element Configuration=Dual, ESD Protection=Yes, Height=1.3mm, Lead Free="Lead Free", Length=3.05mm, Manufacturer Part Number=USBLC6-2SC6, Max Breakdown Voltage=6V, Max Reverse Leakage Current=150nA, Min Breakdown Voltage=6V, Mount="Surface Mount", Number of Bidirectional Channels=2, Number of Channels=2, Number of Elements=1, Number of Pins=6, Packaging="Tape and Reel", Polarity=Unidirectional,Bidirectional, Pricing 1="1=0,50000, 10=0,43100, 100=0,29930, 500=0,23368, 1000=0,19005 (USD)", Radiation Hardening=No, REACH SVHC="No SVHC", Reverse Breakdown Voltage=6V, RoHS=Yes, RoHS Compliant=Yes, series=USB, Stock 1=112981, Supplier 1=Digi-Key, Termination=SMD/SMT, Width=1.75mm
U5: "MCU 32-bit STM32F ARM Cortex M3 RISC 32KB Flash 2.5V/3.3V 48-Pin LQFP Tray", Case/Package=LQFP, Frequency=72MHz, Manufacturer=STMicroelectronics, Max Operating Temperature=85°C, Max Power Dissipation=363mW, Max Supply Voltage=3.6V, Min Operating Temperature=-40°C, Min Supply Voltage=2V, Package Quantity=1500, Supplier Part Number 1=497-11515-ND, Address Bus Width=32b, Category=Microcontrollers, ComponentLink1Description=https://datasheet.ciiva.com/15122/getdatasheetpartid-69879-15122075.pdf?src-supplier=Verical, ComponentLink1URL=https://datasheet.ciiva.com/15122/getdatasheetpartid-69879-15122075.pdf?src-supplier=Verical, ComponentLink2Description=https://datasheet.ciiva.com/14100/pustm-arm-microcont-stm32f103-en-14100507.pdf?src-supplier=Distrelec, ComponentLink2URL=https://datasheet.ciiva.com/14100/pustm-arm-microcont-stm32f103-en-14100507.pdf?src-supplier=Distrelec, Core Architecture=ARM, Data Bus Width=32b, Designed by=BERK, Height=1.4mm, Lead Free="Lead Free", Length=7mm, Manufacturer Part Number=STM32F103C6T6A, Max Frequency=72MHz, Memory Size=32KB, Memory Type=FLASH, Number of ADC Channels=10, Number of Pins=48, Number of Programmable I/O=37, Number of SPI Channels=1, Number of Timers/Counters=3, Number of I2C Channels=1, Number of I/Os=37, Oscillator Type=Internal, Packaging=Tray, Peripherals="POR,PWM,WDT,DMA,Temp Sensor,I2C", Pricing 1="1=5,07000, 10=4,55000, 25=4,30120, 80=3,72763, 250=3,53648, 500=3,18600 (USD)", Pricing 2="250=1,99138, 260=1,95951, 510=1,91172, 1300=1,87986, 2500=1,84800, 13000=1,81613, 25000=1,78427 (USD)", Radiation Hardening=No, RAM Size=10KB, REACH SVHC="No SVHC", RoHS=Yes, RoHS Compliant=Yes, series=STM32F103C6, SleepMode=OK, Stock 1=30, Stock 2=2360, Supplier 1=Digi-Key, Supplier 2=Avnet, Supplier Part Number 2=STM32F103C6T6A, Watchdog Timer=Yes, Weight=0.006409oz, Width=7mm, Interface=I2C,SPI,USART
U6: "SENSOR TEMPERATURE SPI 8SOIC", Case/Package=SOIC, Manufacturer=Maxim, Manufacturer Part Number=MAX6662MSA+, Max Operating Temperature=150°C, Max Power Dissipation=471mW, Max Supply Voltage=5.5V, Min Operating Temperature=-55°C, Min Supply Voltage=3V, Operating Supply Current=600uA, Package Quantity=100, Supplier Part Number 1=MAX6662MSA+-ND, Category="Temperature and Humidity Sensors", ComponentLink1Description=https://datasheet.ciiva.com/5299/max6662-89142-5299456.pdf?src-supplier=Mouser, ComponentLink1URL=https://datasheet.ciiva.com/5299/max6662-89142-5299456.pdf?src-supplier=Mouser, ComponentLink2Description=https://datasheet.ciiva.com/16635/max6662-16635842.pdf?src-supplier=Avnet+Europe, ComponentLink2URL=https://datasheet.ciiva.com/16635/max6662-16635842.pdf?src-supplier=Avnet+Europe, ComponentLink3Description=https://datasheet.ciiva.com/3277/max6662-3277979.pdf?src-supplier=Avnet, ComponentLink3URL=https://datasheet.ciiva.com/3277/max6662-3277979.pdf?src-supplier=Avnet, ComponentLink4Description=https://datasheet.ciiva.com/2003/max6662-2003390.pdf?src-supplier=Digi-Key, ComponentLink4URL=https://datasheet.ciiva.com/2003/max6662-2003390.pdf?src-supplier=Digi-Key, Designed by=BERK, Height=1.5mm, Lead Free="Lead Free", Length=5mm, Max Supply Voltage (DC)=5.5V, Min Supply Voltage (DC)=3V, Number of Bits=12, Number of Pins=8, Output Type=Digital,SPI, Packaging=Rail/Tube, Pricing 1="1=3,20000, 10=2,87000, 25=2,71360, 100=2,35170, 500=2,00196, 1000=1,68840, 5000=1,64820 (USD)", Radiation Hardening=No, REACH SVHC=Unknown, Resolution=12b, RoHS=Yes, RoHS Compliant=Yes, series=MAX6662, Stock 1=753, Supplier 1=Digi-Key, Width=4mm, Interface=SPI
U7: "SMD MODULE, ESP32-D0WDQ6, 32MBIT", Case/Package=SMD/SMT, Frequency=2.5GHz, Manufacturer="Espressif Systems", Max Operating Temperature=+85, Min Operating Temperature=-40, Operating Supply Voltage=3.6V, Package Quantity=550, Supplier Part Number 1=1904-1010-1-ND, Supply Voltage-Nom=3V3, Category="RF Receivers, Transceivers", ComponentLink1Description=https://datasheet.ciiva.com/70828/esp32-wroom-32-datasheet-en-70828769.pdf?src-supplier=Digi-Key, ComponentLink1URL=https://datasheet.ciiva.com/70828/esp32-wroom-32-datasheet-en-70828769.pdf?src-supplier=Digi-Key, ComponentLink2Description=https://datasheet.ciiva.com/69725/esp32-datasheet-en-69725253.pdf?src-supplier=Digi-Key, ComponentLink2URL=https://datasheet.ciiva.com/69725/esp32-datasheet-en-69725253.pdf?src-supplier=Digi-Key, Data Rate=150Mbps, Designed by=BERK, Manufacturer Part Number=ESP32-WROOM-32, Mount="Surface Mount", Packaging="Cut Tape", Pricing 1="1=3,80000 (USD)", RoHS=No, Sensitivity=-98dBm, Supplier 1=Digi-Key, Weight=0.088185oz
U8: library part NCS36000, "PIR Controller Low Noise Amplifiers and LDO Regulator 14-Pin SOIC N T/R", Case/Package=SOIC, Manufacturer="ON Semiconductor", Max Operating Temperature=85°C, Max Supply Voltage=5.75V, Min Operating Temperature=-40°C, Min Supply Voltage=3V, Operating Supply Current=50uA, Package Quantity=1, Quiescent Current=20uA, Supplier Part Number 1=NCS36000DRGOSCT-ND, Category="Amplifiers - Op Amps, Buffer, Instrumentation", ComponentLink1Description=https://datasheet.ciiva.com/1781/ncs36000-d-1781637.pdf?src-supplier=Digi-Key, ComponentLink1URL=https://datasheet.ciiva.com/1781/ncs36000-d-1781637.pdf?src-supplier=Digi-Key, ComponentLink2Description=https://datasheet.ciiva.com/4763/ncs36000-d-89569-4763639.pdf?src-supplier=Mouser, ComponentLink2URL=https://datasheet.ciiva.com/4763/ncs36000-d-89569-4763639.pdf?src-supplier=Mouser, ComponentLink3Description=https://datasheet.ciiva.com/1781/ncs36000-d-1781638.pdf?src-supplier=Digi-Key, ComponentLink3URL=https://datasheet.ciiva.com/1781/ncs36000-d-1781638.pdf?src-supplier=Digi-Key, ComponentLink4Description=https://datasheet.ciiva.com/1781/ncs36000-d-1781639.pdf?src-supplier=Digi-Key, ComponentLink4URL=https://datasheet.ciiva.com/1781/ncs36000-d-1781639.pdf?src-supplier=Digi-Key, ComponentLink5Description=https://datasheet.ciiva.com/26166/ncs36000-d-26166711.pdf?src-supplier=Avnet+Europe, ComponentLink5URL=https://datasheet.ciiva.com/26166/ncs36000-d-26166711.pdf?src-supplier=Avnet+Europe, ComponentLink6Description=https://datasheet.ciiva.com/2965/ncs36000-d-2965212.pdf?src-supplier=Avnet, ComponentLink6URL=https://datasheet.ciiva.com/2965/ncs36000-d-2965212.pdf?src-supplier=Avnet, ComponentLink7Description=https://datasheet.ciiva.com/2966/ncs36000-d-2966525.pdf?src-supplier=Avnet, ComponentLink7URL=https://datasheet.ciiva.com/2966/ncs36000-d-2966525.pdf?src-supplier=Avnet, Designed by=BERK, Halogen Free="Halogen Free", Height=1.5mm, Lead Free="Lead Free", Length=8.75mm, Manufacturer Part Number=NCS36000DRG, Number of Pins=14, Output Type=Digital, Packaging="Tape and Reel", Pricing 1="1=1,00000, 10=0,89400, 25=0,84880, 100=0,65180, 250=0,57600, 500=0,54568, 1000=0,42442 (USD)", Radiation Hardening=No, REACH SVHC="No SVHC", RoHS=Yes, RoHS Compliant=Yes, series=-, Stock 1=36750, Supplier 1=Digi-Key, Width=4mm, Input Type=DIGITAL
U9: library part OPA314, "Op Amp OPA314", Case/Package=SOT-23-5, Manufacturer="Texas Instruments", Max Dual Supply Voltage=2.75V, Max Operating Temperature=125°C, Max Supply Voltage=5.5V, Max I/O Voltage=2.5mV, Min Dual Supply Voltage=900mV, Min Operating Temperature=-40°C, Min Supply Voltage=1.8V, Nominal Supply Current=150uA, Output Current=20mA, Package Quantity=1, Power Supply Rejection Ratio (PSRR)=78dB, Supplier Part Number 1=296-36699-1-ND, Voltage Gain=128dB, Input Bias Current=10pA, Amplifier Type="GENERAL PURPOSE", Category="Amplifiers - Op Amps, Buffer, Instrumentation", Common Mode Rejection Ratio=75dB, ComponentLink1Description=https://datasheet.ciiva.com/14462/opa2314-14462006.pdf?src-supplier=Avnet, ComponentLink1URL=https://datasheet.ciiva.com/14462/opa2314-14462006.pdf?src-supplier=Avnet, ComponentLink2Description=https://datasheet.ciiva.com/26226/opa2314-26226295.pdf?src-supplier=Avnet+Europe, ComponentLink2URL=https://datasheet.ciiva.com/26226/opa2314-26226295.pdf?src-supplier=Avnet+Europe, ComponentLink3Description=https://datasheet.ciiva.com/14456/opa2314-14456281.pdf?src-supplier=Avnet, ComponentLink3URL=https://datasheet.ciiva.com/14456/opa2314-14456281.pdf?src-supplier=Avnet, ComponentLink4Description=https://datasheet.ciiva.com/29638/opa314-29638827.pdf?src-supplier=Digi-Key, ComponentLink4URL=https://datasheet.ciiva.com/29638/opa314-29638827.pdf?src-supplier=Digi-Key, Contact Plating=Gold, Designed by=BERK, Gain Bandwidth Product=3MHz, Lead Free="Lead Free", Manufacturer Part Number=OPA314AIDBVR, Nominal Gain Bandwidth Product=3MHz, Number of Channels=1, Number of Circuits=1, Number of Elements=1, Number of Pins=5, Operating Supply Current=150uA, Output Current per Channel=20mA, Packaging="Tape and Reel", Pricing 1="1=1,06000, 10=0,95100, 25=0,90240, 100=0,69280, 250=0,61224, 500=0,58004, 1000=0,45114 (USD)", Radiation Hardening=No, RoHS=Yes, RoHS Compliant=Yes, series=-, Slew Rate=1.5V/µs, Stock 1=964, Supplier 1=Digi-Key, Supply Current=150uA, Technology=CMOS, Unity Gain Bandwidth Product=3MHz, Input Offset Voltage (Vos)=2.5mV
USB1: library part "Micro B USB Connector", "CONN RCPT USB2.0 MICRO B SMD R/A", Color=Black, Current Rating=1.8A, Flammability Rating="UL94 V-0", Manufacturer="Amphenol FCI", Max Operating Temperature=85°C, Max Voltage Rating (AC)=100V, Min Operating Temperature=-55°C, Package Quantity=1400, Supplier Part Number 1=609-4613-2-ND, Insulation Resistance=1GR, Category="USB Connectors", ComponentLink1Description=https://datasheet.ciiva.com/26853/getdatasheetpartid-418041-26853891.pdf?src-supplier=Verical, ComponentLink1URL=https://datasheet.ciiva.com/26853/getdatasheetpartid-418041-26853891.pdf?src-supplier=Verical, ComponentLink2Description=https://datasheet.ciiva.com/851/10118192-851112.pdf?src-supplier=Digi-Key, ComponentLink2URL=https://datasheet.ciiva.com/851/10118192-851112.pdf?src-supplier=Digi-Key, ComponentLink3Description=https://datasheet.ciiva.com/4598/10118192ac-197249-4598796.pdf?src-supplier=Mouser, ComponentLink3URL=https://datasheet.ciiva.com/4598/10118192ac-197249-4598796.pdf?src-supplier=Mouser, Connector Type=USB,Receptacle, Contact Material="Copper Alloy", Contact Plating=Gold, Depth=5.57mm, Designed by=BERK, Features=Shielded, Gender=Receptacle, Housing Material=Polymer, Lead Free="Lead Free", Length=7.86mm, Manufacturer Part Number=10118192-0001LF, Mount="Surface Mount,Horizontal", Number of Contacts=5, Number of Ports=1, Number of Terminals/Pins=5, Orientation="Right Angle", Packaging="Tape and Reel", Pitch=0.65mm, Pricing 1="1400=0,22558, 2800=0,20624, 7000=0,19335, 9800=0,18046, 14000=0,17402, 35000=0,17144 (USD)", Radiation Hardening=No, REACH SVHC="No SVHC", RoHS=Yes, Stock 1=158200, Supplier 1=Digi-Key, Termination=Solder, USB Standard="USB 2.0", Voltage Rating=100V
X1: library part "CRYSTAL 32768kHZ", "Crystal, 32.768 kHz, SMD, 1.6mm x 1mm, 12.5 pF, 20 ppm, ABS05 Series", Case/Package=SMD/SMT, ESR (Equivalent Series Resistance)=90kR, Frequency=32.768kHz, Frequency Tolerance=20ppm, Load Capacitance=12.5pF, Manufacturer=Abracon, Max Operating Temperature=85°C, Min Operating Temperature=-40°C, Operating Frequency="32.768 kHz", Package Quantity=3000, Supplier Part Number 1=535-11899-1-ND, Category=Crystals, ComponentLink1Description=https://datasheet.ciiva.com/23810/abs05-23810480.pdf?src-supplier=Newark, ComponentLink1URL=https://datasheet.ciiva.com/23810/abs05-23810480.pdf?src-supplier=Newark, ComponentLink2Description=https://datasheet.ciiva.com/6728/abs05-6728949.pdf?src-supplier=Digi-Key, ComponentLink2URL=https://datasheet.ciiva.com/6728/abs05-6728949.pdf?src-supplier=Digi-Key, ComponentLink3Description=https://datasheet.ciiva.com/6728/abs05-6728950.pdf?src-supplier=Digi-Key, ComponentLink3URL=https://datasheet.ciiva.com/6728/abs05-6728950.pdf?src-supplier=Digi-Key, ComponentLink4Description=https://datasheet.ciiva.com/16411/abs05-16411149.pdf?src-supplier=Future+Electronics, ComponentLink4URL=https://datasheet.ciiva.com/16411/abs05-16411149.pdf?src-supplier=Future+Electronics, Depth=1mm, Designed by=BERK, Height=0.02inch, Lead Free="Lead Free", Length=1.6mm, Manufacturer Part Number=ABS05-32.768KHZ-T, Mount="Surface Mount", Number of Pins=2, Packaging="Tape and Reel", Pricing 1="1=1,16000, 10=1,02500, 50=0,95760, 100=0,84630, 500=0,80180, 1000=0,66816 (USD)", Radiation Hardening=No, REACH SVHC="No SVHC", RoHS=Yes, RoHS Compliant=Yes, series=ABS05, Series Resistance=90kR, Stock 1=180522, Supplier 1=Digi-Key, Termination=SMD/SMT, Tolerance=20ppm, Width=0.039inch